# Altium PCB PCB_XL6009-BUCK-BOOST-CONVERTER_2_2025-05-19 - Copy.pcbdoc
Units mil, origin at the board's own origin, x right, y up, seen from the top; angles counter-clockwise.
Board outline 2831.5 x 2515 mil, 2 copper layers (Top Layer, Bottom Layer); 18 components, 10 nets, 45 pads, 67 vias.
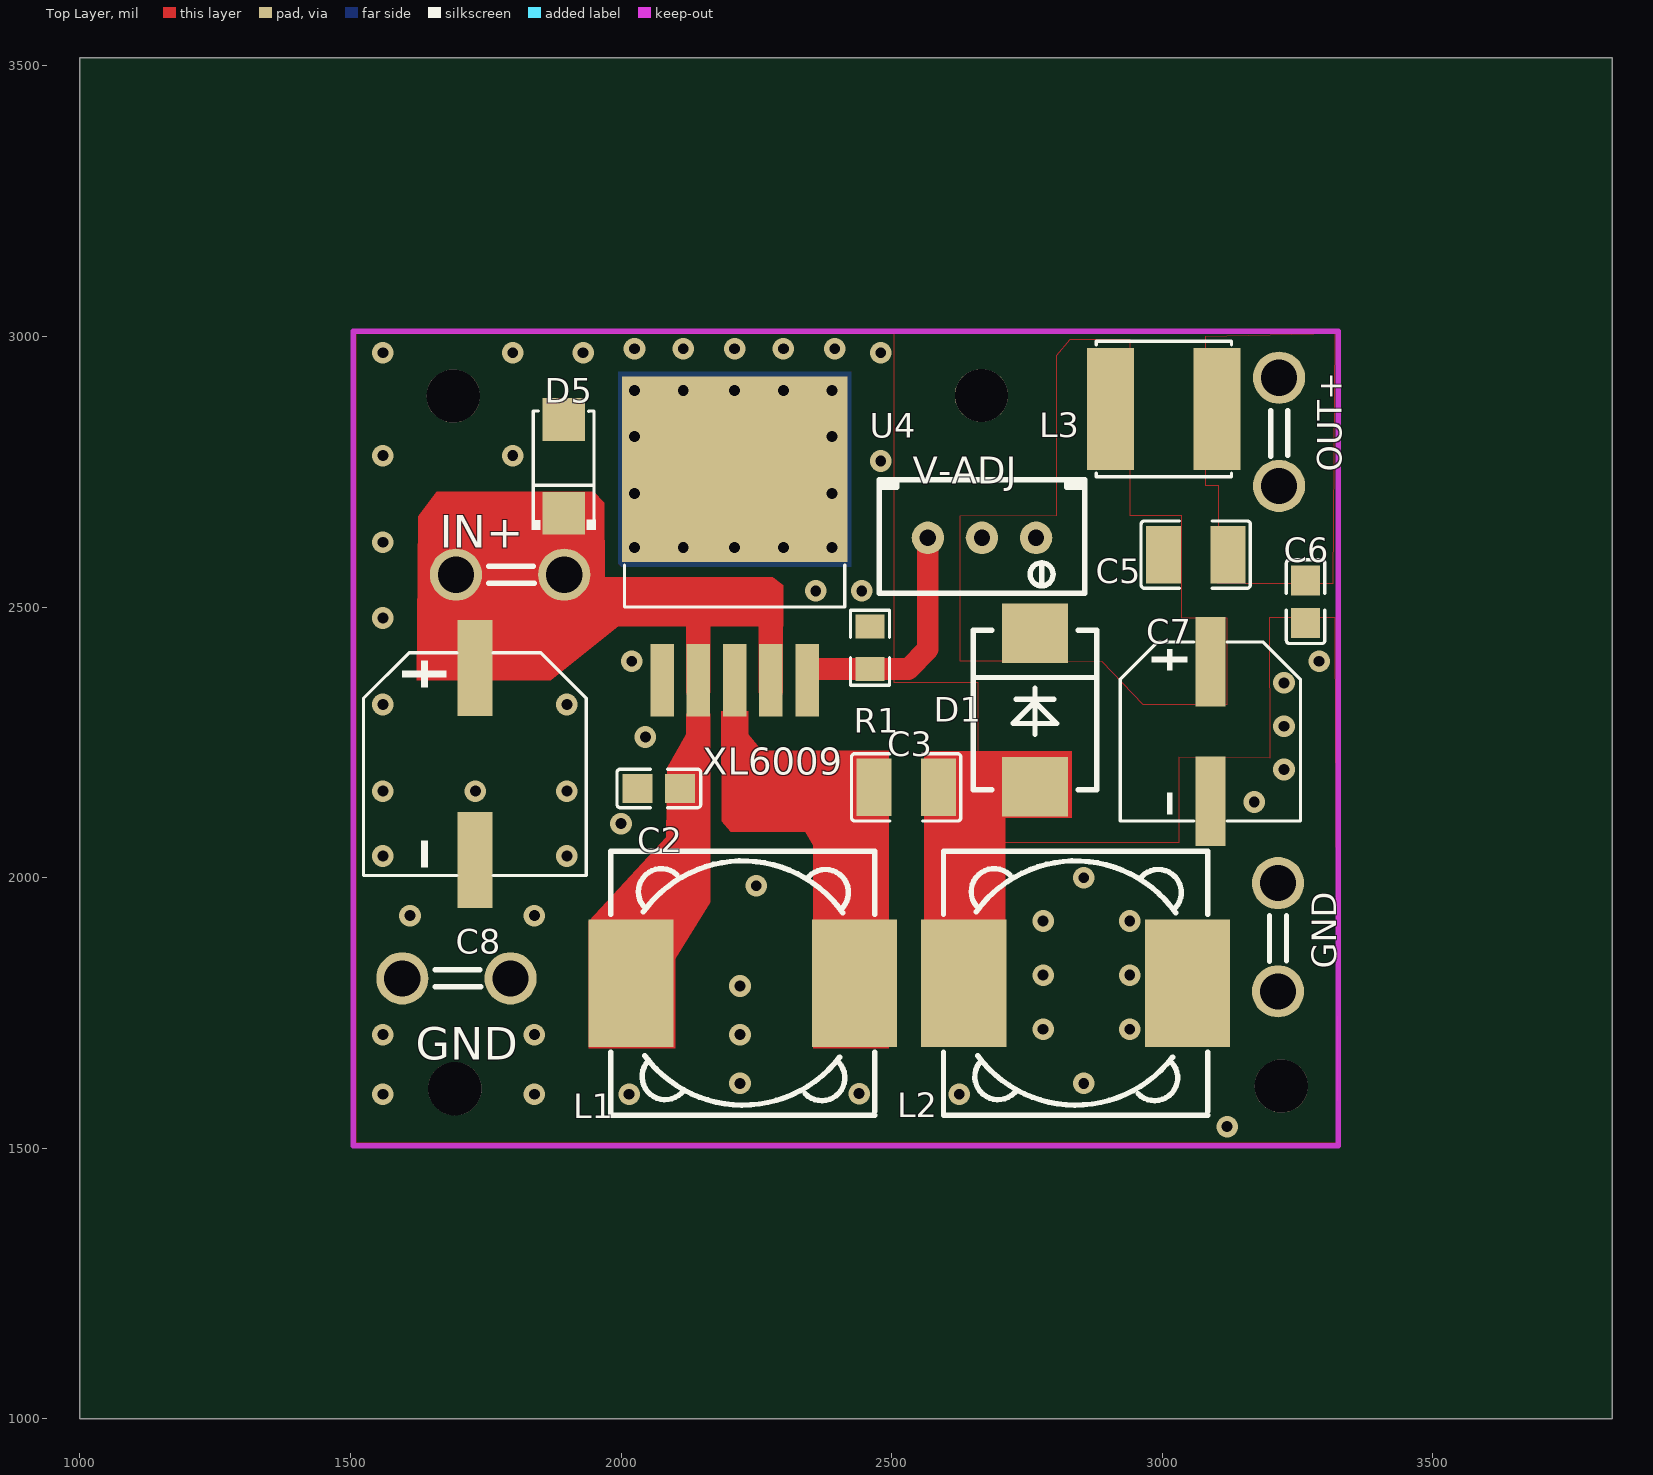
[diagram p0: Top Layer view]
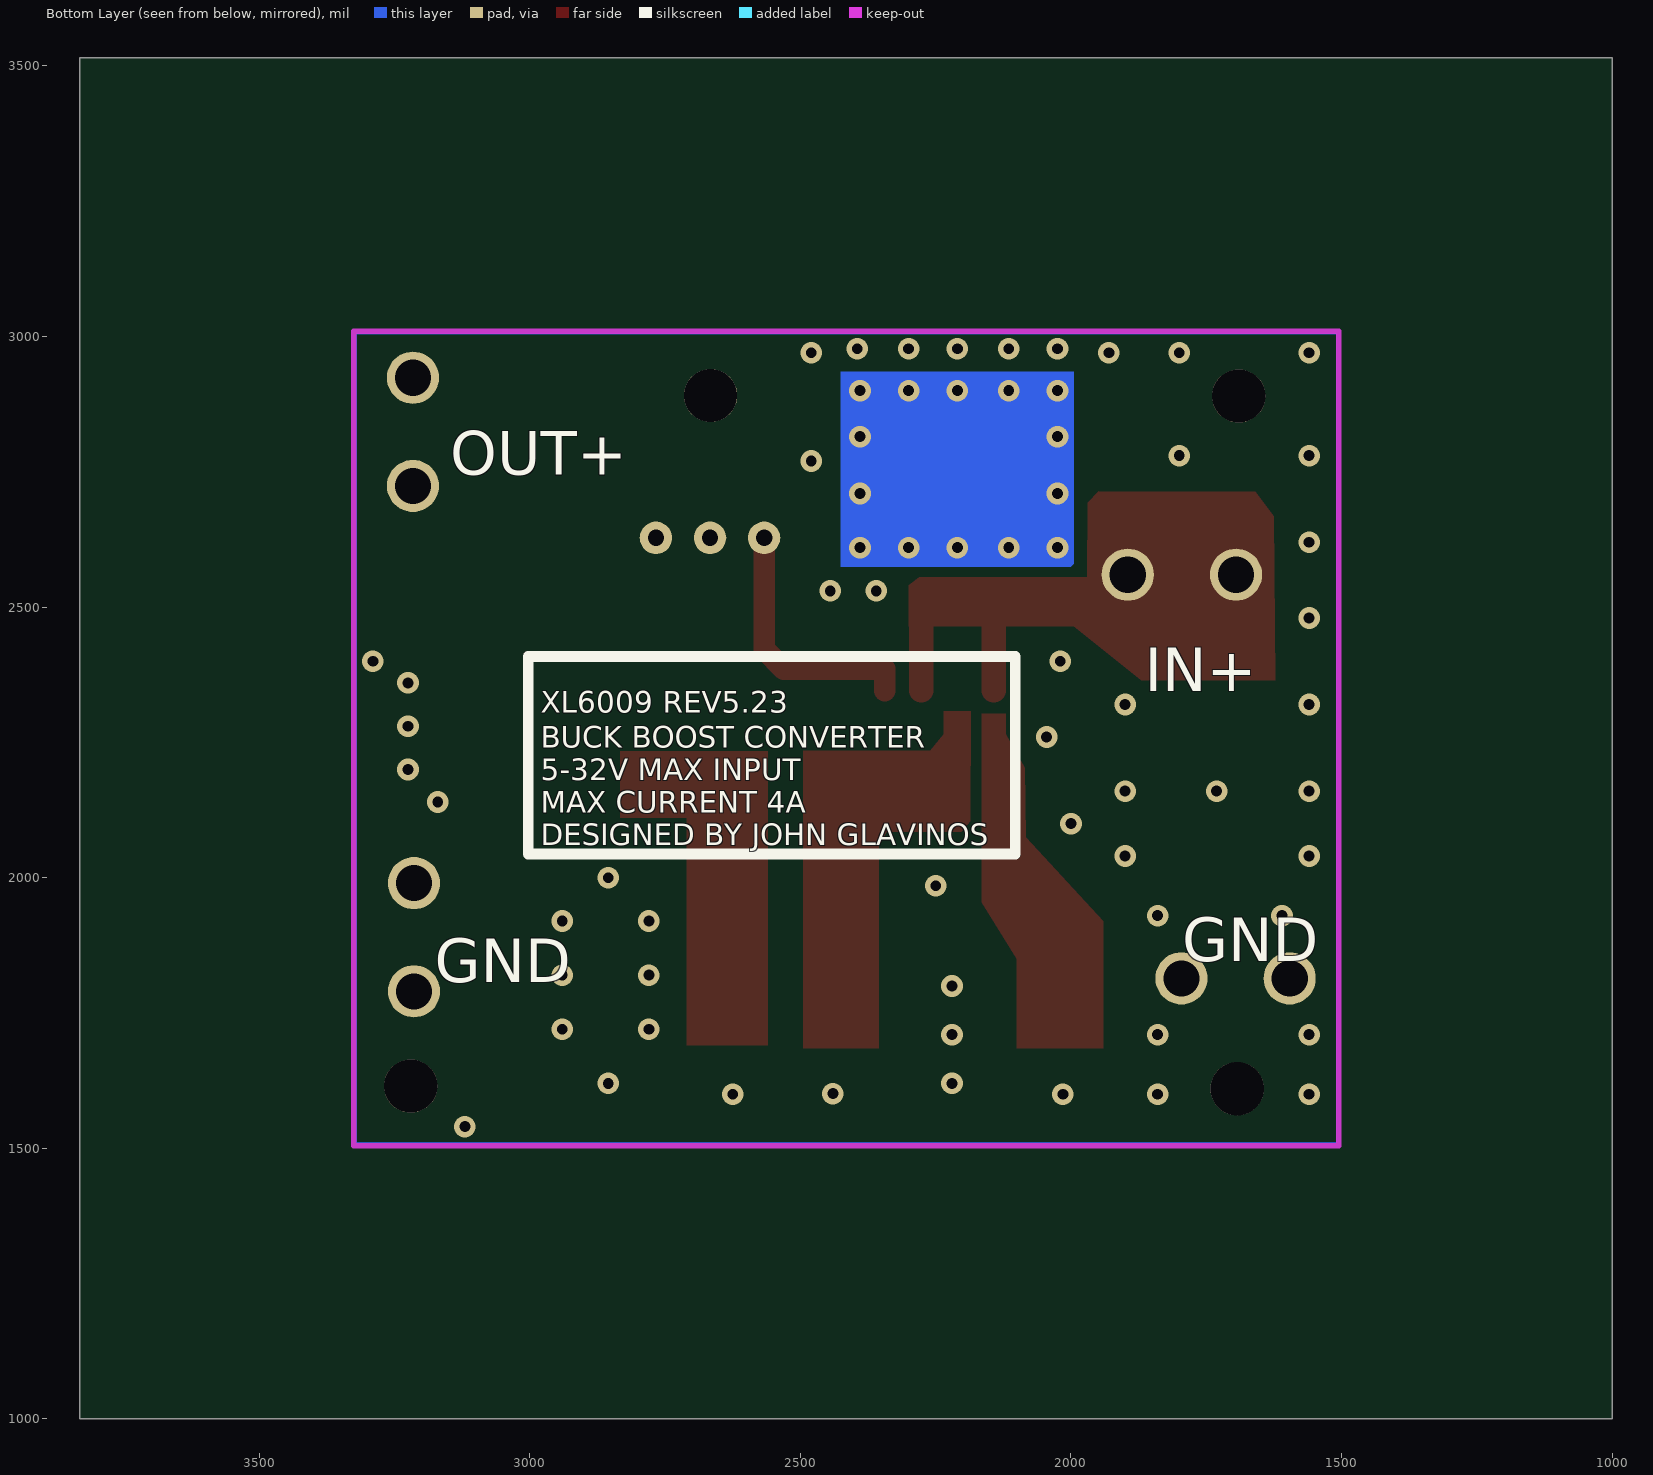
[diagram p1: Bottom Layer view, seen from below]

## Layer stack, top to bottom
Top Layer: signal copper (thickness not stored)
Dielectric: dielectric 12.6, FR-4, Dk 4.8
Bottom Layer: signal copper (thickness not stored)

## Board outline
3831.5,1000 1000,1000 1000,3515 3831.5,3515

## Components (designator, comment, footprint, x,y, rotation, side; value= is the part's Value field where it differs from the comment)
C2 "224" C0805 2070,2165 r0 top
C3 "C1210" C1210 2527,2167 r0 top
C5 "C1210" C1210 3062,2597 r0 top
C6 "224" C0805 3265,2510 r90 top
C7 "CAP-SMD_BD8.0-L8.3-W8.3-FD" CAP-SMD_BD8.0-L8.3-W8.3-FD 3089,2270 r270 top
C8 "CAP-SMD_BD10.0-L10.3-W10.3-LS11.0-FD" CAP-SMD_BD10.0-L10.3-W10.3-LS11.0-FD 1730,2210 r270 top
D1 "SS54C" SMC_L7.5-W5.8-LS8.3-RD 2765,2310 r270 top
D5 "SMA_L4.3-W2.6-LS5.1-RD" SMA_L4.3-W2.6-LS5.1-RD 1894,2760 r90 top
GND "JNQ032" CONN-TH_JNQ032 1696,1814 r180 top
GND "OUT-" CONN-TH_JNQ032 3214,1890 r90 top
IN+ "JNQ032" CONN-TH_JNQ032 1795,2560 r180 top
L1 "33uH" IND-SMD_L12.3-W12.3 2225,1805 r0 top
L2 "33uH" IND-SMD_L12.3-W12.3 2840,1805 r0 top
L3 "IND-SMD_L6.0-W6.0" IND-SMD_L6.0-W6.0 3003,2866 r0 top
OUT+ "OUT+" CONN-TH_JNQ032 3216,2824 r90 top
R1 "330" R0805 2460,2425 r270 top
U4 "TO-263-5_L10.2-W8.6-P1.70-LS14.4-TL" TO-263-5_L10.2-W8.6-P1.70-LS14.4-TL 2210,2560 r90 top
V-ADJ "RES-ADJ-TH_3296W" RES-ADJ-TH_3296W 2667,2628 r270 top

## Footprints (in the part's own frame and the unit in brackets; to place one, negate y for a bottom-side part, rotate by r counter-clockwise, add the part's x,y. Pads: shape width x height; smd on the part's side, far side on the other; paste and mask are expansions set on the pad)
C0805 [mm]
  rect 1.41x1.35 smd paste-100 mask+0.051: 1(-1,0) 2(1,0)
  silkscreen extent -1.96,-0.9 1.96,0.9
C1210 [mm]
  rect 1.635x2.7 smd paste-100 mask+0.051: 1(-1.517,0) 2(1.517,0)
  silkscreen extent -2.56,-1.58 2.56,1.58
CAP-SMD_BD8.0-L8.3-W8.3-FD [mm]
  rect 4.2x1.4 smd paste+0 mask+0.051: 1(-3.267,0) 2(3.267,0)
  silkscreen extent -4.2,-4.23 4.2,4.23
CAP-SMD_BD10.0-L10.3-W10.3-LS11.0-FD [mm]
  rect 4.5x1.65 smd paste+0 mask+0.051: 1(-4.5,0) 2(4.5,0)
  silkscreen extent -5.23,-5.23 5.23,5.23
CONN-TH_JNQ032 [mm]
  round 2.45 hole 1.7 paste+0 mask+0.05: 1(-2.54,0) 2(2.54,0)
  silkscreen extent -1.14,-0.4 1,0.4
IND-SMD_L6.0-W6.0 [mm]
  rect 2.2x5.72 smd paste+0 mask+0.051: 1(-2.5,0) 2(2.5,0)
  silkscreen extent -3.18,-3.18 3.18,3.18
IND-SMD_L12.3-W12.3 [mm]
  rect 4x6 smd paste+0 mask+0.051: 1(-5.25,0) 2(5.25,0)
  silkscreen extent -6.2,-6.2 6.2,6.2
R0805 [mil]
  rect 44.59x54.21 smd paste-3937.01 mask+2: 1(-39.37,0) 2(39.37,0)
  silkscreen extent -69,-36 69,36
RES-ADJ-TH_3296W [mil]
  round 60 hole 30 paste+0 mask+2: 1(0,100.01) 2(0,0.01) 3(0,-99.99)
  silkscreen extent -108,-190 102,190
SMA_L4.3-W2.6-LS5.1-RD [mm]
  rect 2x2 smd paste+0 mask+0.051: 1(-2.2,0) 2(2.2,0)
  silkscreen extent -2.98,-1.5 2.6,1.5
SMC_L7.5-W5.8-LS8.3-RD [mm]
  rect 2.8x3.1 smd paste+0 mask+0.05: 1(-3.6,0) 2(3.6,0)
  silkscreen extent -3.75,-2.9 3.75,2.9
TO-263-5_L10.2-W8.6-P1.70-LS14.4-TL [mm]
  rect 3.4x1.1 smd paste+0 mask+0.051: 1(-4.953,3.4) 2(-4.953,1.7) 3(-4.953,0) 4(-4.953,-1.7) 5(-4.953,-3.4)
  rect 8.705x10.587 smd paste+0 mask+0.051: 6(4.953,0)
  silkscreen extent -1.52,-5.17 0.45,5.17

## Free pads (board coordinates)
  round 98.43 hole 98.43 unplated paste+0: ""(1690,2890) ""(1693,1610) ""(2666,2891) ""(3220,1615)

## Via types
v1: diameter 40, hole 20, Top Layer to Bottom Layer, tented both sides, 67 vias

## Nets (pads, with @x,y where several pads share a name; then routed paths per layer and width w, separated by ;. In a path a pad name is that pad's centre, name@x,y a point inside that pad or via, vN(x,y) a via of type N, cw(c..) or ccw(c..) an arc to the next point about the centre after c; other vN are vias at no path point)
C3_2: C3.2 D1.2 L2.1
GND: C2.1 C6.1 C7.2 C8.2 D5.2 GND.1 GND.2 L2.2 R1.1 U4.1
  other v1: 3120,1540 1560,1600 1840,1600 2015,1600 2625,1600 2440,1601 2220,1620 2855,1620 1560,1710 1840,1710 2220,1710 2780,1720 2940,1720 2220,1800 2780,1820 2940,1820 2780,1920 2940,1920 1610,1930 1840,1930 2250,1985 2855,2000 1560,2040 1900,2040 2000,2100 3170,2140 1560,2160 1731,2160 1900,2160 3225,2200 2045,2260 3225,2280 1560,2320 1900,2320 3225,2360 2020,2400 3290,2400 1560,2480 2360,2530 2445,2530 1560,2620 2480,2770 1560,2780 1800,2780 1560,2970 1800,2970 1930,2970 2480,2970 2025,2977.5 2115,2977.5 2210,2977.5 2300,2977.5 2395,2977.5
L3_2: C5.2 C6.2 L3.2 OUT+.1 OUT+.2
PR1_1: C5.1 C7.1 D1.1 L3.1 V-ADJ.1 V-ADJ.2
S$133: 
S$10111: 
U1_3: U4.6
  other v1: 2025,2610 2115,2610 2210,2610 2300,2610 2390,2610 2025,2710 2390,2710 2025,2815 2390,2815 2025,2900 2115,2900 2210,2900 2300,2900 2390,2900
U1_5: R1.2 U4.5 V-ADJ.3 | length 483.7
  Top Layer w40: U4.5@2344,2346 2344,2385.6 R1.2 2530.6,2385.6 2566.99,2421.99 V-ADJ.3
U1_39: C3.1 L1.2 U4.3
VCC: C2.2 C8.1 D5.1 IN+.1 IN+.2 L1.1 U4.2 U4.4 | length 298
  Top Layer w45: U4.2@2143,2346 2143,2495 ; U4.4@2277,2346 2277,2495

## Polygon pours and split planes (outlines as drawn)
GND on Bottom Layer (solid): 1510,3005 1510,1510 3320,1510 3320,3005
GND on Top Layer (solid): 1510,3005 1510,1510 3325,1510 3320,2445 3320,2480 3198,2480 3199,2221 3031,2223 3031,2065 2660,2065 2660,2250 2660,2360 2505,2360 2505,2485 2505,3005
L3_2 on Top Layer (solid): 3080,3000 3080,2725 3104,2725 3103,2544 3316,2544 3320,3005
PR1_1 on Top Layer (solid): 2805,2965 2830,2995 2940,2995 2940,2670 3035,2670 3035,2480 3119,2480 3119,2320 2965,2320 2889,2399 2720,2400 2627,2400 2627,2669 2805,2670

## Other copper
Top Layer:
  region net C3_2: 2710,2110 2710,1690 2560,1690 2560,2100 2560,2234 2833,2234 2833,2111
  region net VCC: 1625,2668 1660,2713 1949,2714 1969,2693 1970,2555 2280,2555 2300,2540 2300,2465 1995,2465 1870,2365 1623,2365
  region net U1_39: 2340,2085 2203,2085 2186,2104 2185,2308 2235,2308 2235,2265 2260,2235 2495,2235 2495,1685 2355,1685 2355,1920 2355,2060
  region net VCC: 1940,1685 2100,1685 2100,1850 2165,1955 2165,2303 2121,2303 2121,2265 2085,2203 2084,2075 1940,1920
Bottom Layer:
  region net U1_3: 1995,2935 1995,2580 2000,2575 2425,2575 2425,2935

## Silkscreen, mask and mechanical layers (free items; w line width, h text height)
Top Overlay:
  text "XL6009" at 2150,2190 h50
Bottom Overlay:
  lines w20 net S$10111: 2103,2044 3003,2044 3003,2409 2103,2409 2103,2269 2103,2044
  text "OUT+" at 3147,2745 h80
  text "IN+" at 1864,2345 h80
  text "XL6009 REV5.23" at 2980,2305 h40
  text "BUCK BOOST CONVERTER" at 2980,2240 h40
  text "5-32V MAX INPUT" at 2980,2180 h40
  text "MAX CURRENT 4A" at 2980,2120 h40
  text "DESIGNED BY JOHN GLAVINOS" at 2980,2060 h40
  text "GND" at 1794,1846 h80
  text "GND" at 3176,1807 h80
Bottom Solder:
  region net U1_3: 1995,2935 1995,2580 2000,2575 2425,2575 2425,2935